# Altium PCB encoder-mjf.PcbDoc
Units mm, origin at the board's own origin, x right, y up, seen from the top; angles counter-clockwise.
Board outline 48.38 x 48.14 mm, 2 copper layers (Top Layer, Bottom Layer); 11 components, 19 nets, 50 pads, 1 vias.
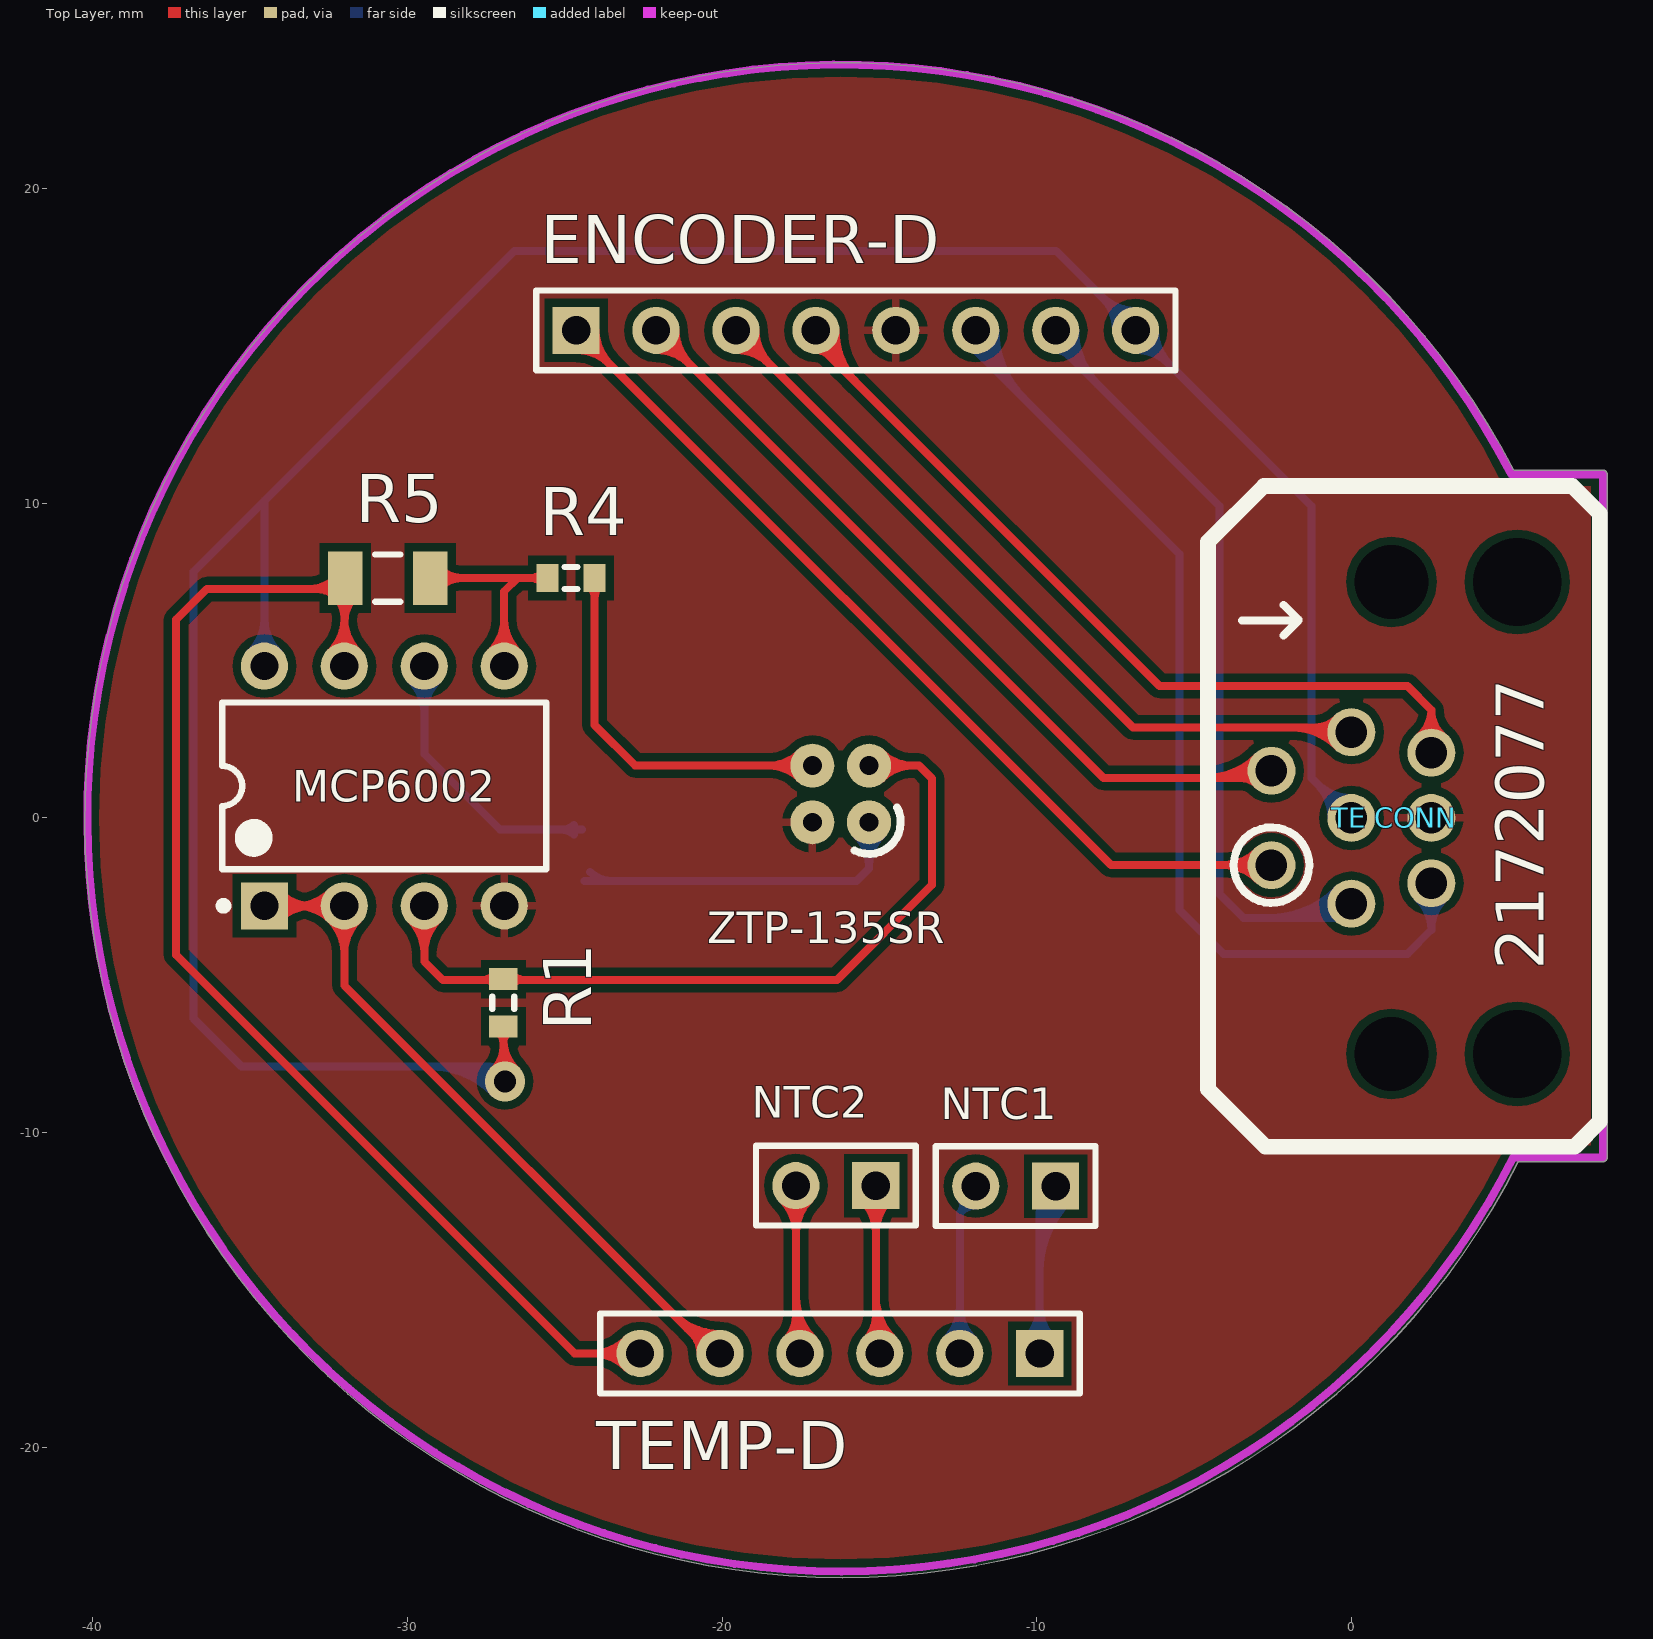
[diagram p0: Top Layer view]
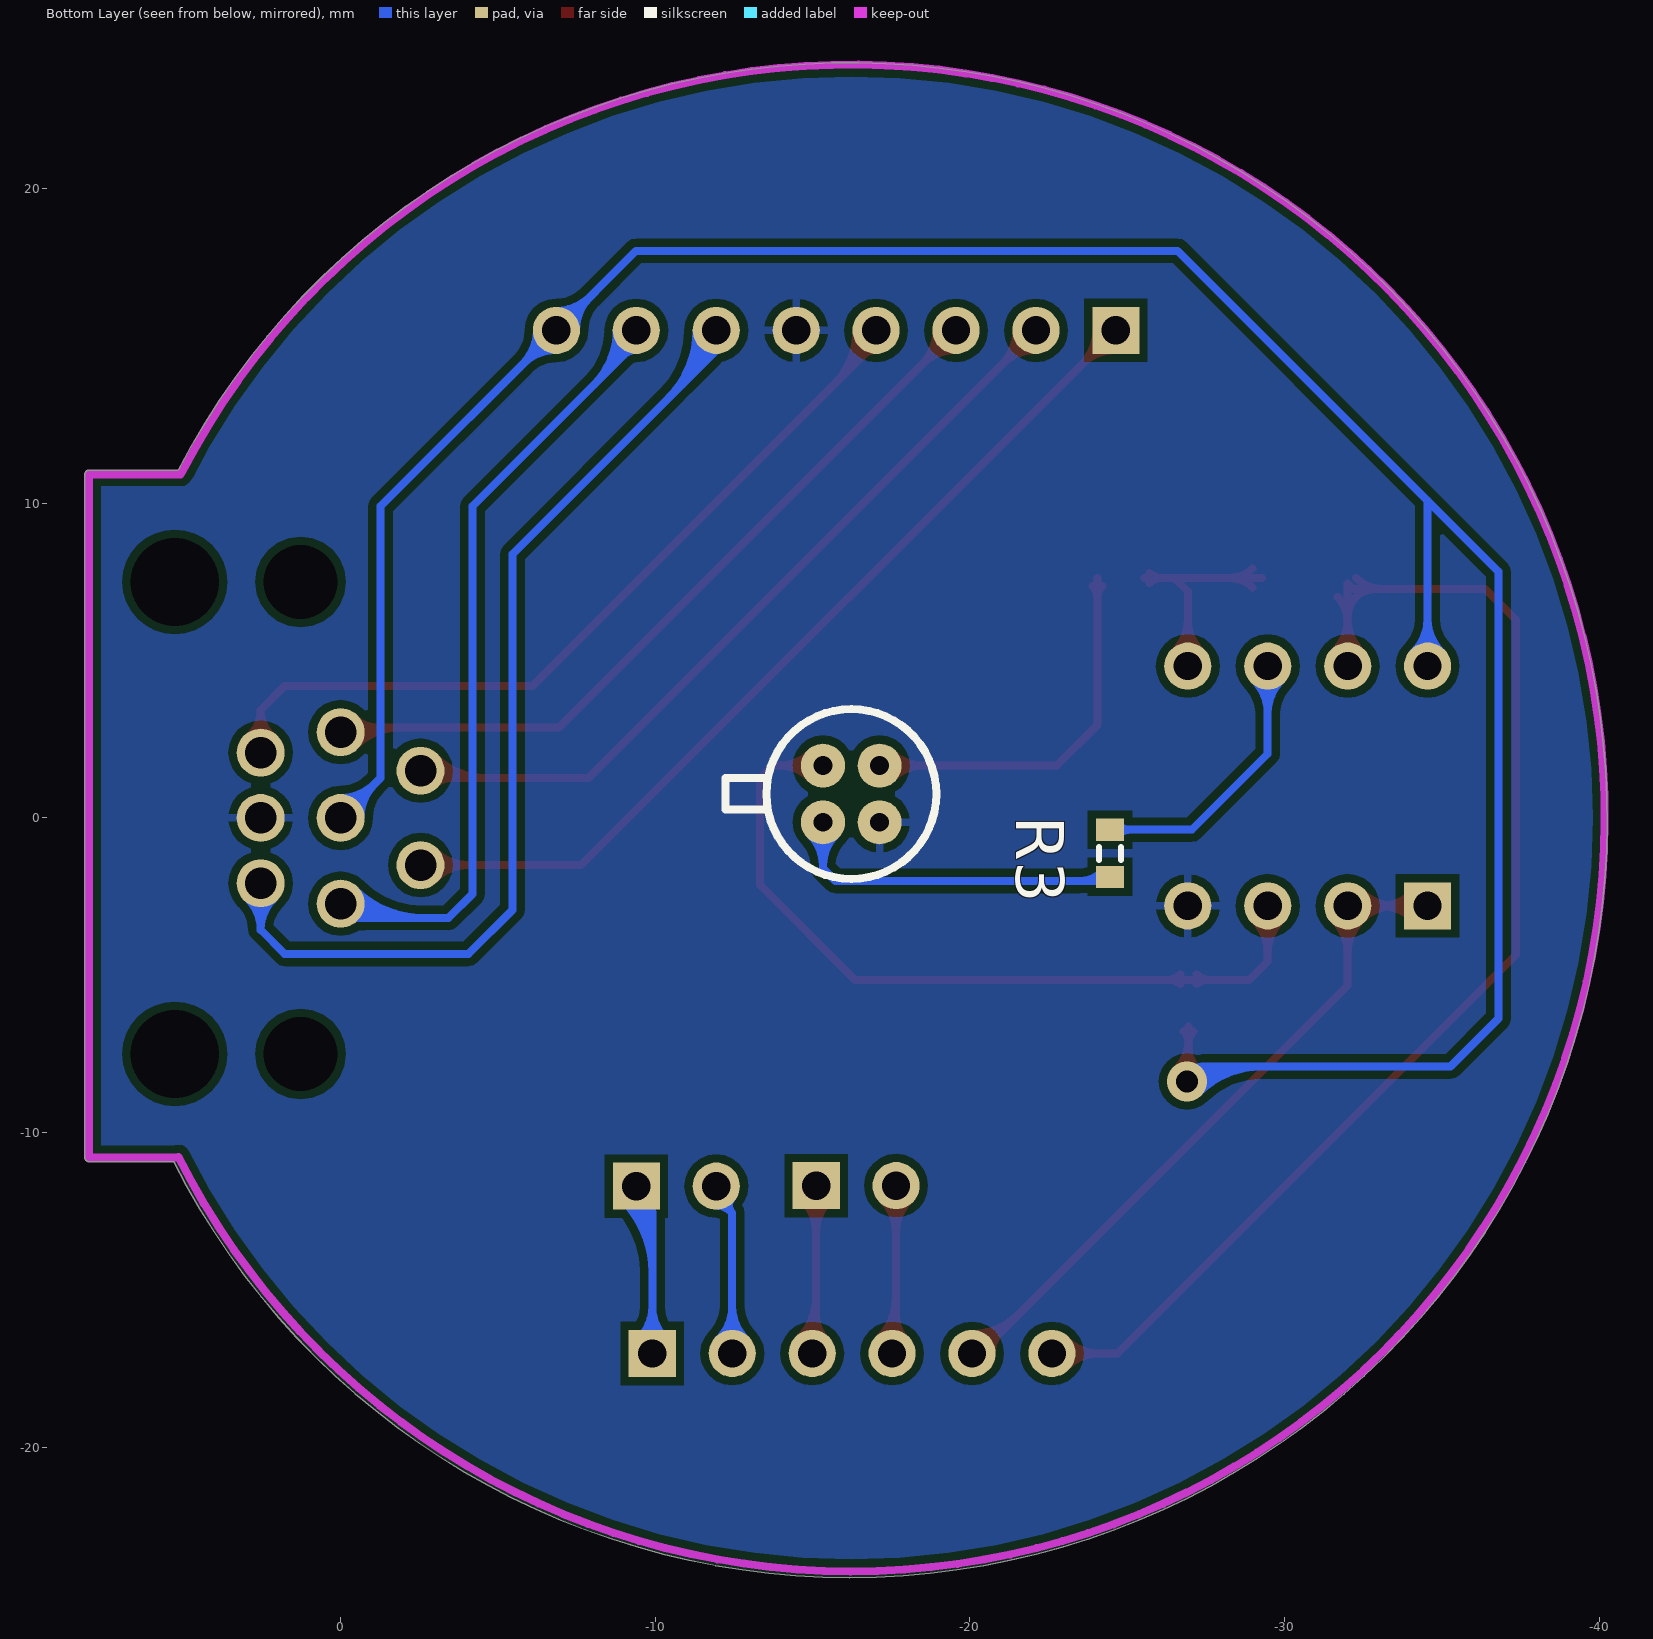
[diagram p1: Bottom Layer view, seen from below]

## Layer stack, top to bottom
Top Layer: signal copper 0.0356
Dielectric: dielectric 0.32, FR-4, Dk 4.8
Bottom Layer: signal copper 0.0356

## Board outline
5.3,-10.922 cw(c-16.183,-0.07) 5.164,11.049 8.001,11.049 cw(c8.001,10.922) 8.128,10.922 8.128,-10.795 cw(c8.001,-10.795) 8.001,-10.922

## Design rules (kind name [scope] priority, off if disabled: settings)
Clearance [All] p1: gap=0.254
PolygonConnect [All] p1: connectstyle=Relief reliefconductorwidth=0.254 reliefentries=4 polygonreliefangle="90 Angle" airgapwidth=0.254
RoutingVias [All] p1: holewidth=0.711 width=1.27 viastyle="Through Hole" minholewidth=0.711 minwidth=1.27 maxholewidth=0.711 maxwidth=1.27
SolderMaskExpansion [All] p1: expansion=0.102
Width [All] p1: maxlimit=0.254 minlimit=0.254 preferedwidth=0.254
28 further rules are at their usual default settings.

## Components (designator, comment, footprint, x,y, rotation, side; value= is the part's Value field where it differs from the comment)
ENCODER-D "Header 8" HDR1X8 -24.638,15.494 r0 top
MCP6002 "OP AMP" DIP-8 -30.734,1.016 r90 top
NTC1 "Header 2" HDR1X2 -9.4,-11.7 r180 top
NTC2 "Header 2" HDR1X2 -15.113,-11.684 r180 top
R1 "Res3" J1-0603 -26.95,-5.875 r270 top
R3 "Res3" J1-0603 -24.45,-1.125 r270 bottom
R4 "Res3" J1-0603 -24.8,7.625 r180 top
R5 "Res3" C1206 -30.625,7.625 r180 top
"TE CONN" "8 PIN TH 90D" NG_CD_2172077 1.27,-7.5 r90 top
TEMP-D "Header 6" HDR1X6 -9.906,-17.018 r180 top
ZTP-135SR "IR Temperature" ZTP-135SR -16.23,0.762 r180 top

## Footprints (in the part's own frame and the unit in brackets; to place one, negate y for a bottom-side part, rotate by r counter-clockwise, add the part's x,y. Pads: shape width x height; smd on the part's side, far side on the other; paste and mask are expansions set on the pad)
C1206 [mm] "Chip Capacitor, Body 3.2x1.6mm, IPC High Density"
  rect 1.1x1.7 smd: 1(-1.35,0) 2(1.35,0)
  silkscreen extent -0.4,-0.75 0.4,0.75, body extent -1.7,-0.9 1.7,0.9, height 1.3
DIP-8 [mm] "DIP; 8 Leads; Row Spacing 7.62 mm; Pitch 2.54 mm"
  rect 1.5x1.5 hole 0.9: 1(-3.81,3.81)
  round 1.5 hole 0.9: 2(-3.81,1.27) 3(-3.81,-1.27) 4(-3.81,-3.81) 5(3.81,-3.81) 6(3.81,-1.27) 7(3.81,1.27) 8(3.81,3.81)
  silkscreen extent -3.93,-5.15 2.65,5.23, body extent -3.6,-5.15 3.6,5.15, height 5.08
HDR1X2 [mm] "Connector; Header; 2 Position"
  rect 1.5x1.5 hole 0.9: 1(0,0)
  round 1.5 hole 0.9: 2(2.54,0)
  silkscreen extent -1.27,-1.27 3.81,1.27
HDR1X6 [mm] "Connector; Header; 6 Position"
  rect 1.5x1.5 hole 0.9: 1(0,0)
  round 1.5 hole 0.9: 2(2.54,0) 3(5.08,0) 4(7.62,0) 5(10.16,0) 6(12.7,0)
  silkscreen extent -1.27,-1.27 13.97,1.27
HDR1X8 [mm] "Connector; Header; 8 Position"
  rect 1.5x1.5 hole 0.9: 1(0,0)
  round 1.5 hole 0.9: 2(2.54,0) 3(5.08,0) 4(7.62,0) 5(10.16,0) 6(12.7,0) 7(15.24,0) 8(17.78,0)
  silkscreen extent -1.27,-1.27 19.05,1.27
J1-0603 [mm] "Chip Resistor, Body 1.6x0.8mm, IPC High Density"
  rect 0.7x0.9 smd: 1(-0.75,0) 2(0.75,0)
  silkscreen extent -0.2,-0.35 0.2,0.35, body extent -0.85,-0.48 0.85,0.48, height 0.9
NG_CD_2172077 [mm]
  round 1.524 hole 1: 1(6,3.81) 2(9,3.81) 3(10.225,1.27) 4(9.575,-1.27) 5(7.5,-1.27) 6(5.425,-1.27) 7(4.775,1.27) 8(7.5,1.27)
  round 0 hole 2.35: 9(0,0) 9(15,0)
  round 0 hole 2.8: 9(0,-4) 9(15,-4)
  silkscreen extent -2.95,-6.63 18.05,5.82, body extent -2.25,-22.57 17.25,4.2, height 17.03
ZTP-135SR [mm] "IR Sensor"
  round 1.4 hole 0.6: 1(-0.9,0.9) 2(-0.9,-0.9) 3(0.9,-0.9) 4(0.9,0.9)
  silkscreen extent -1.91,0.43 -0.44,1.91, body extent -2.68,-2.69 2.7,2.69, height 3.7

## Part data
ENCODER-D: "Header, 8-Pin"
MCP6002: library part MCP6002-I/P
NTC1 NTC2: "Header, 2-Pin"
R1 R3 R4 R5: "Resistor"
"TE CONN": library part NG-CD-2172077
TEMP-D: "Header, 6-Pin"
ZTP-135SR: library part ZTP-135SR, "Thermistor + Thermophile"

## Via types
v1: diameter 1.27, hole 0.711, Top Layer to Bottom Layer, 1 vias

## Nets (pads, with @x,y where several pads share a name; then routed paths per layer and width w, separated by ;. In a path a pad name is that pad's centre, name@x,y a point inside that pad or via, vN(x,y) a via of type N, cw(c..) or ccw(c..) an arc to the next point about the centre after c; other vN are vias at no path point)
BLUE: "TE CONN.2" ENCODER-D.2 | length 33.9
  Top Layer w0.254: ENCODER-D.2@-22.098,14.871 cw(c-22.098,13.367) -21.034,14.43 cw(c-19.971,15.494) ENCODER-D.2@-21.475,15.494 ; ENCODER-D.2@-22.098,15.125 cw(c-22.098,14.234) -21.468,14.864 cw(c-20.838,15.494) ENCODER-D.2@-21.729,15.494 ; ENCODER-D.2 -7.874,1.27 -2.77,1.27 -2.54,1.5 ; -4.628,1.27 ccw(c-4.628,3.588) -2.989,1.949 ; -4.015,1.27 ccw(c-4.015,2.975) -2.809,1.769 ; -3.518,1.27 cw(c-3.518,0.522) -2.989,1.051 ; -3.402,1.27 ccw(c-3.402,2.362) -2.63,1.59
BROWN/GREEN: "TE CONN.8" ENCODER-D.8 MCP6002.8 R1.2 | length 110.9
  Top Layer w0.254: v1@-27.259,-8.016 ccw(c-28.006,-7.269) -26.95,-7.269 ; -26.95,-7.641 ccw(c-26.166,-7.641) v1@-26.72,-8.195 ; -26.95,-7.028 ccw(c-25.553,-7.028) v1@-26.541,-8.016 ; R1.2 -26.95,-8.325 v1(-26.9,-8.375) ; -26.95,-7.163 cw(c-26.412,-7.163) -26.792,-6.783 ccw(c-26.412,-7.163) -26.95,-7.163 ; -26.95,-7.163 ccw(c-27.488,-7.163) -27.108,-6.783 cw(c-27.488,-7.163) -26.95,-7.163
  Bottom Layer w0.254: MCP6002.8@-34.985,5.267 ccw(c-36.048,6.33) -34.544,6.33 ccw(c-33.04,6.33) MCP6002.8@-34.103,5.267 ; MCP6002.8@-34.805,5.087 ccw(c-35.435,5.717) -34.544,5.717 ccw(c-33.653,5.717) MCP6002.8@-34.283,5.087 ; MCP6002.8 -34.544,10.081 ; -29.273,-7.9 cw(c-29.273,-10.748) v1@-27.259,-8.734 ; -28.66,-7.9 cw(c-28.66,-10.135) v1@-27.08,-8.555 ; -28.047,-7.9 cw(c-28.047,-9.522) v1(-26.9,-8.375) -27.375,-7.9 -35.275,-7.9 -36.8,-6.375 -36.8,7.825 -34.544,10.081 ; -27.434,-7.9 cw(c-27.434,-8.909) v1@-26.72,-8.195 ; ENCODER-D.8@-7.481,15.494 ccw(c-8.985,15.494) -7.922,16.558 ccw(c-6.858,17.621) ENCODER-D.8@-6.858,16.117 ; ENCODER-D.8@-7.227,15.494 ccw(c-8.118,15.494) -7.488,16.124 ccw(c-6.858,16.754) ENCODER-D.8@-6.858,15.863 ; ENCODER-D.8@-6.858,14.871 cw(c-6.858,13.367) -5.794,14.43 cw(c-4.731,15.494) ENCODER-D.8@-6.235,15.494 ; ENCODER-D.8@-6.858,15.125 cw(c-6.858,14.234) -6.228,14.864 cw(c-5.598,15.494) ENCODER-D.8@-6.489,15.494 ; -0.635,0 ccw(c-2.168,0) -1.084,1.084 ccw(c0,2.168) 0,0.635 ; -0.381,0 ccw(c-1.301,0) -0.65,0.65 ccw(c0,1.301) 0,0.381 ; 0,0 -1.27,1.27 -1.27,9.906 ENCODER-D.8 -9.389,18.025 -26.6,18.025 -34.544,10.081
GNDP: R4.1 ZTP-135SR.3 | length 17.2
  Top Layer w0.254: R4.1 -24.05,2.95 -22.762,1.662 ZTP-135SR.3 ; ZTP-135SR.3@-17.535,1.257 ccw(c-18.513,0.279) -18.513,1.662 ccw(c-18.513,3.045) ZTP-135SR.3@-17.535,2.067 ; ZTP-135SR.3@-17.356,1.436 ccw(c-17.9,0.892) -17.9,1.662 ccw(c-17.9,2.432) ZTP-135SR.3@-17.356,1.888 ; -24.05,6.987 cw(c-23.512,6.987) -23.892,7.367 ccw(c-23.512,6.987) -24.05,6.987 ; -24.05,6.987 ccw(c-24.588,6.987) -24.208,7.367 cw(c-24.588,6.987) -24.05,6.987
GRAY: "TE CONN.3" ENCODER-D.3 | length 32.1
  Top Layer w0.254: ENCODER-D.3@-19.558,14.871 cw(c-19.558,13.367) -18.494,14.43 cw(c-17.431,15.494) ENCODER-D.3@-18.935,15.494 ; ENCODER-D.3@-19.558,15.125 cw(c-19.558,14.234) -18.928,14.864 cw(c-18.298,15.494) ENCODER-D.3@-19.189,15.494 ; ENCODER-D.3 -6.939,2.875 -0.15,2.875 0,2.725 ; -1.895,2.875 cw(c-1.895,0.83) -0.449,2.276 ; -1.282,2.875 cw(c-1.282,1.443) -0.269,2.456 ; -1.171,2.875 ccw(c-1.171,3.896) -0.449,3.174
NetMCP6002_6: MCP6002.6 R3.1 | length 14.6
  Bottom Layer w0.254: MCP6002.6@-29.905,4.385 cw(c-30.968,3.322) -29.464,3.322 cw(c-27.96,3.322) MCP6002.6@-29.023,4.385 ; MCP6002.6@-29.725,4.565 cw(c-30.355,3.935) -29.464,3.935 cw(c-28.573,3.935) MCP6002.6@-29.203,4.565 ; MCP6002.6@-29.706,5.068 MCP6002.6 -29.464,2.039 -27.05,-0.375 R3.1 ; -25.088,-0.375 cw(c-25.088,-0.913) -24.708,-0.533 ccw(c-25.088,-0.913) -25.088,-0.375 ; -25.088,-0.375 ccw(c-25.088,0.163) -24.708,-0.217 cw(c-25.088,0.163) -25.088,-0.375
NTC2+: NTC2.1 TEMP-D.3 | length 12.6
  Top Layer w0.254: NTC2.1@-15.554,-12.125 cw(c-16.617,-13.188) -15.113,-13.188 cw(c-13.609,-13.188) NTC2.1@-14.672,-12.125 ; TEMP-D.3@-15.427,-16.577 ccw(c-16.183,-15.821) -15.113,-15.821 ccw(c-13.789,-15.821) TEMP-D.3@-14.725,-16.757 ; NTC2.1@-15.374,-11.945 cw(c-16.004,-12.575) -15.113,-12.575 cw(c-14.222,-12.575) NTC2.1@-14.852,-11.945 ; -15.113,-15.207 ccw(c-13.175,-15.207) TEMP-D.3@-14.545,-16.577 ; NTC2.1 -15.113,-16.891 TEMP-D.3
NTC2-: NTC2.2 TEMP-D.4 | length 12.6
  Top Layer w0.254: NTC2.2@-18.094,-12.125 cw(c-19.157,-13.188) -17.653,-13.188 cw(c-16.149,-13.188) NTC2.2@-17.212,-12.125 ; TEMP-D.4@-17.967,-16.577 ccw(c-18.723,-15.821) -17.653,-15.821 ccw(c-16.329,-15.821) TEMP-D.4@-17.265,-16.757 ; NTC2.2@-17.914,-11.945 cw(c-18.544,-12.575) -17.653,-12.575 cw(c-16.762,-12.575) NTC2.2@-17.392,-11.945 ; -17.653,-15.207 ccw(c-15.715,-15.207) TEMP-D.4@-17.085,-16.577 ; NTC2.2 -17.653,-16.891 TEMP-D.4
NTC+: NTC1.1 TEMP-D.1 | length 17.8
  Bottom Layer w0.254: TEMP-D.1@-10.347,-16.577 ccw(c-11.41,-15.514) -9.906,-15.514 ccw(c-8.402,-15.514) TEMP-D.1@-9.465,-16.577 ; TEMP-D.1@-10.167,-16.757 ccw(c-10.797,-16.127) -9.906,-16.127 ccw(c-9.015,-16.127) TEMP-D.1@-9.645,-16.757 ; TEMP-D.1 -9.906,-12.556 ; -9.906,-14.426 cw(c-6.674,-14.426) NTC1.1@-8.959,-12.141 ; -9.906,-13.812 cw(c-7.288,-13.812) NTC1.1@-9.139,-11.961 ; -9.906,-13.199 cw(c-7.901,-13.199) NTC1.1@-9.319,-11.781 ; -9.906,-12.586 cw(c-8.514,-12.586) NTC1.1@-9.498,-11.602 ; NTC1.1@-9.883,-12.094 cw(c-10.15,-12.312) -9.906,-12.556 ; -9.866,-12.516 cw(c-9.4,-12.982) NTC1.1@-9.4,-12.323 ; NTC1.1@-9,-11.65 -9.906,-12.556
NTC-: NTC1.2 TEMP-D.2 | length 11.6
  Bottom Layer w0.254: TEMP-D.2@-12.887,-16.577 ccw(c-13.95,-15.514) -12.446,-15.514 ccw(c-10.942,-15.514) TEMP-D.2@-12.005,-16.577 ; TEMP-D.2@-12.707,-16.757 ccw(c-13.337,-16.127) -12.446,-16.127 ccw(c-11.555,-16.127) TEMP-D.2@-12.185,-16.757 ; TEMP-D.2 -12.446,-12.556 ; NTC1.2@-11.54,-11.65 -12.446,-12.556 ; -12.446,-12.556 ccw(c-12.69,-12.312) -12.423,-12.094 cw(c-12.69,-12.312) -12.446,-12.556 ; -12.406,-12.516 cw(c-11.94,-12.982) -11.94,-12.323 ccw(c-11.94,-12.982) -12.406,-12.516
PHILE: R3.2 ZTP-135SR.1 | length 14.8
  Bottom Layer w0.254: R3.2@-24.375,-2 -15.725,-2 -15.33,-1.605 ZTP-135SR.1 ; R3.2@-24.192,-1.717 ccw(c-23.51,-1.035) -23.51,-2 ; ZTP-135SR.1@-15.735,-0.543 cw(c-16.713,-1.521) -15.33,-1.521 cw(c-13.947,-1.521) ZTP-135SR.1@-14.925,-0.543 ; ZTP-135SR.1@-15.556,-0.364 cw(c-16.1,-0.908) -15.33,-0.908 cw(c-14.56,-0.908) ZTP-135SR.1@-15.104,-0.364
PINK: "TE CONN.4" ENCODER-D.4 | length 34
  Top Layer w0.254: ENCODER-D.4@-17.018,14.871 cw(c-17.018,14.287) -16.605,14.7 ; ENCODER-D.4 -17.018,15.113 -6.096,4.191 1.778,4.191 2.54,3.429 2.54,2.075 ; ENCODER-D.4@-16.903,15.494 ccw(c-15.706,15.494) -16.552,14.647 ; ENCODER-D.4@-16.649,15.494 ccw(c-14.838,15.494) -16.119,14.214 ; ENCODER-D.4@-16.395,15.494 ccw(c-13.971,15.494) -15.685,13.78 ; 2.134,2.563 ccw(c1.414,3.429) 2.54,3.429 ccw(c3.666,3.429) 2.946,2.563 ; 2.296,2.368 ccw(c1.864,2.887) 2.54,2.887 ccw(c3.216,2.887) 2.784,2.368
THERMISTOR: MCP6002.3 R1.1 ZTP-135SR.2 | length 35.5
  Top Layer w0.254: MCP6002.3@-29.905,-3.235 cw(c-30.968,-4.298) -29.464,-4.298 cw(c-27.96,-4.298) MCP6002.3@-29.023,-3.235 ; MCP6002.3@-29.725,-3.055 cw(c-30.355,-3.685) -29.464,-3.685 cw(c-28.573,-3.685) MCP6002.3@-29.203,-3.055 ; MCP6002.3 -29.464,-4.561 -28.875,-5.15 -16.35,-5.15 -13.325,-2.125 -13.325,1.25 -13.737,1.662 ZTP-135SR.2 ; ZTP-135SR.2@-15.104,1.436 cw(c-14.56,0.892) -14.56,1.662 cw(c-14.56,2.432) ZTP-135SR.2@-15.104,1.888 ; ZTP-135SR.2@-14.925,1.257 cw(c-13.947,0.279) -13.947,1.662 cw(c-13.947,3.045) ZTP-135SR.2@-14.925,2.067 ; -27.649,-5.15 ccw(c-27.649,-4.526) -27.208,-4.967 cw(c-27.649,-4.526) -27.649,-5.15 ; -27.528,-5.15 cw(c-27.528,-5.603) -27.208,-5.283 ccw(c-27.528,-5.603) -27.528,-5.15 ; R1.1@-26.692,-5.283 cw(c-26.372,-5.603) -26.372,-5.15 ccw(c-26.372,-5.603) R1.1@-26.692,-5.283 ; R1.1@-26.692,-4.967 ccw(c-26.251,-4.526) -26.251,-5.15 cw(c-26.251,-4.526) R1.1@-26.692,-4.967
VIB: MCP6002.5 R4.2 R5.1 | length 13.8
  Top Layer w0.254: R5.1 -26.5,7.625 ; R5.1@-28.976,7.326 cw(c-28.254,6.604) -28.254,7.625 cw(c-28.254,8.646) R5.1@-28.976,7.924 ; MCP6002.5@-27.365,5.267 ccw(c-28.428,6.33) -26.924,6.33 ccw(c-25.42,6.33) MCP6002.5@-26.483,5.267 ; MCP6002.5@-27.185,5.087 ccw(c-27.815,5.717) -26.924,5.717 ccw(c-26.033,5.717) MCP6002.5@-26.663,5.087 ; MCP6002.5 -26.924,7.201 -26.5,7.625 ; R4.2 -26.5,7.625 ; -26.088,7.625 cw(c-26.088,7.087) -25.708,7.467 ccw(c-26.088,7.087) -26.088,7.625 ; -26.088,7.625 ccw(c-26.088,8.163) -25.708,7.783 cw(c-26.088,8.163) -26.088,7.625
VIOLET: "TE CONN.7" ENCODER-D.7 | length 36.2
  Bottom Layer w0.254: ENCODER-D.7@-9.398,14.871 cw(c-9.398,14.287) -8.985,14.7 ; ENCODER-D.7 -9.398,15.113 -4.191,9.906 -4.191,-2.413 -3.429,-3.175 -0.45,-3.175 0,-2.725 ; ENCODER-D.7@-9.283,15.494 ccw(c-8.086,15.494) -8.932,14.647 ; ENCODER-D.7@-9.029,15.494 ccw(c-7.218,15.494) -8.499,14.214 ; ENCODER-D.7@-8.775,15.494 ccw(c-6.351,15.494) -8.065,13.78 ; -2.619,-3.175 ccw(c-2.619,-0.106) -0.449,-2.276 ; -2.006,-3.175 ccw(c-2.006,-0.719) -0.269,-2.456 ; -1.393,-3.175 ccw(c-1.393,-1.332) -0.09,-2.635 ; -0.78,-3.175 ccw(c-0.78,-1.945) 0.09,-2.815
VOA: MCP6002.1 MCP6002.2 TEMP-D.5 | length 36.7
  Top Layer w0.254: MCP6002.1 MCP6002.2 -32.004,-5.321 -20.307,-17.018 TEMP-D.5 ; MCP6002.1@-34.283,-3.055 cw(c-33.653,-3.685) -33.653,-2.794 cw(c-33.653,-1.903) MCP6002.1@-34.283,-2.533 ; MCP6002.1@-34.103,-3.235 cw(c-33.04,-4.298) -33.04,-2.794 cw(c-33.04,-1.29) MCP6002.1@-34.103,-2.353 ; MCP6002.2@-32.445,-2.353 cw(c-33.508,-1.29) -33.508,-2.794 cw(c-33.508,-4.298) -32.445,-3.235 cw(c-33.508,-4.298) -32.004,-4.298 cw(c-30.5,-4.298) MCP6002.2@-31.563,-3.235 ; MCP6002.2@-32.265,-2.533 cw(c-32.895,-1.903) -32.895,-2.794 cw(c-32.895,-3.685) -32.265,-3.055 cw(c-32.895,-3.685) -32.004,-3.685 cw(c-31.113,-3.685) MCP6002.2@-31.743,-3.055 ; -21.541,-15.784 ccw(c-20.066,-14.309) TEMP-D.5@-20.066,-16.395 ; -21.107,-16.218 ccw(c-20.066,-15.176) TEMP-D.5@-20.066,-16.649 ; -20.959,-16.366 cw(c-21.611,-17.018) TEMP-D.5@-20.689,-17.018
VOB: MCP6002.7 R5.2 TEMP-D.6 | length 49.8
  Top Layer w0.254: -33.117,7.275 ccw(c-33.117,8.467) R5.2@-32.274,7.624 ; -32.875,7.275 cw(c-32.875,6.425) -32.274,7.026 cw(c-32.926,6.374) -32.004,6.374 ; MCP6002.7@-32.445,5.267 ccw(c-33.508,6.33) -32.004,6.33 ccw(c-30.5,6.33) MCP6002.7@-31.563,5.267 ; MCP6002.7@-32.265,5.087 ccw(c-32.895,5.717) -32.004,5.717 ccw(c-31.113,5.717) MCP6002.7@-31.743,5.087 ; MCP6002.7 -32.004,7.454 -32.183,7.275 -36.375,7.275 -37.35,6.3 -37.35,-4.35 -24.682,-17.018 TEMP-D.6 ; -32.004,6.234 cw(c-30.884,6.234) R5.2@-31.676,7.026 ; TEMP-D.6@-23.047,-17.459 ccw(c-24.11,-18.522) -24.11,-17.018 ccw(c-24.11,-15.514) TEMP-D.6@-23.047,-16.577 ; TEMP-D.6@-22.867,-17.279 ccw(c-23.497,-17.909) -23.497,-17.018 ccw(c-23.497,-16.127) TEMP-D.6@-22.867,-16.757
WHITE: "TE CONN.1" ENCODER-D.1 | length 36.8
  Top Layer w0.254: ENCODER-D.1@-24.638,14.871 cw(c-24.638,13.367) -23.574,14.43 cw(c-22.511,15.494) ENCODER-D.1@-24.015,15.494 ; ENCODER-D.1@-24.638,15.125 cw(c-24.638,14.234) -24.008,14.864 cw(c-23.378,15.494) ENCODER-D.1@-24.269,15.494 ; ENCODER-D.1 -7.644,-1.5 -2.54,-1.5 ; -2.989,-1.949 ccw(c-4.073,-3.033) -4.073,-1.5 ccw(c-4.073,0.033) -2.989,-1.051 ; -2.809,-1.769 ccw(c-3.46,-2.42) -3.46,-1.5 ccw(c-3.46,-0.58) -2.809,-1.231
WHITE/GREEN: "TE CONN.5" ENCODER-D.5 MCP6002.4 ZTP-135SR.4 | length 0.6
  Top Layer w0.254: ZTP-135SR.4@-17.13,-0.455 ZTP-135SR.4 ; ENCODER-D.5@-14.478,15.253 ENCODER-D.5
YELLOW: "TE CONN.6" ENCODER-D.6 | length 41.8
  Bottom Layer w0.254: ENCODER-D.6@-12.077,15.494 ccw(c-10.88,15.494) -11.726,14.647 ; ENCODER-D.6 -11.938,14.859 -5.461,8.382 -5.461,-2.921 -4.064,-4.318 1.778,-4.318 2.54,-3.556 ; ENCODER-D.6@-11.823,15.494 ccw(c-10.012,15.494) -11.293,14.214 ; ENCODER-D.6@-11.569,15.494 ccw(c-9.145,15.494) -10.859,13.78 ; ENCODER-D.6@-11.315,15.494 ccw(c-8.278,15.494) -10.425,13.346 ; 2.102,-2.535 cw(c1.131,-3.556) 2.54,-3.556 ; 2.277,-2.351 cw(c1.694,-2.964) 2.54,-2.964 cw(c3.386,-2.964) 2.803,-2.351 ; 2.54,-2.075 2.54,-3.556 ; 2.978,-2.535 ccw(c3.949,-3.556) 2.54,-3.556
pads on no net: "TE CONN.9"

## Polygon pours and split planes (outlines as drawn)
WHITE/GREEN on Top Layer "Top Layer-No Net" (solid, remove dead copper, pour order 6): -45.15,26.85 10.075,26.85 10.075,-26.375 10.15,-26.45 9.625,-26.975 -45.225,-26.975
WHITE/GREEN on Bottom Layer "Top Layer-No Net" (solid, remove dead copper, pour order 8): -44.875,26.05 11.825,26.05 11.925,26.15 12,26.075 12,-27.575 -43.575,-27.575 -44.875,-26.275

## Keep-outs
Keep-Out Layer:
  lines w0.254: 5.038,10.994 ccw(c-16.23,0) 5.153,-10.768 ; 5.08,10.922 8.001,10.922 8.001,-10.795 5.153,-10.795

## Text inside footprints (layer, text, board x,y; h text height)
"TE CONN": Top Overlay "2172077" at 6.12,-4.825 h1.52 r90